# EAGLE board Kitty_PCB (EAGLE 9.2.2)
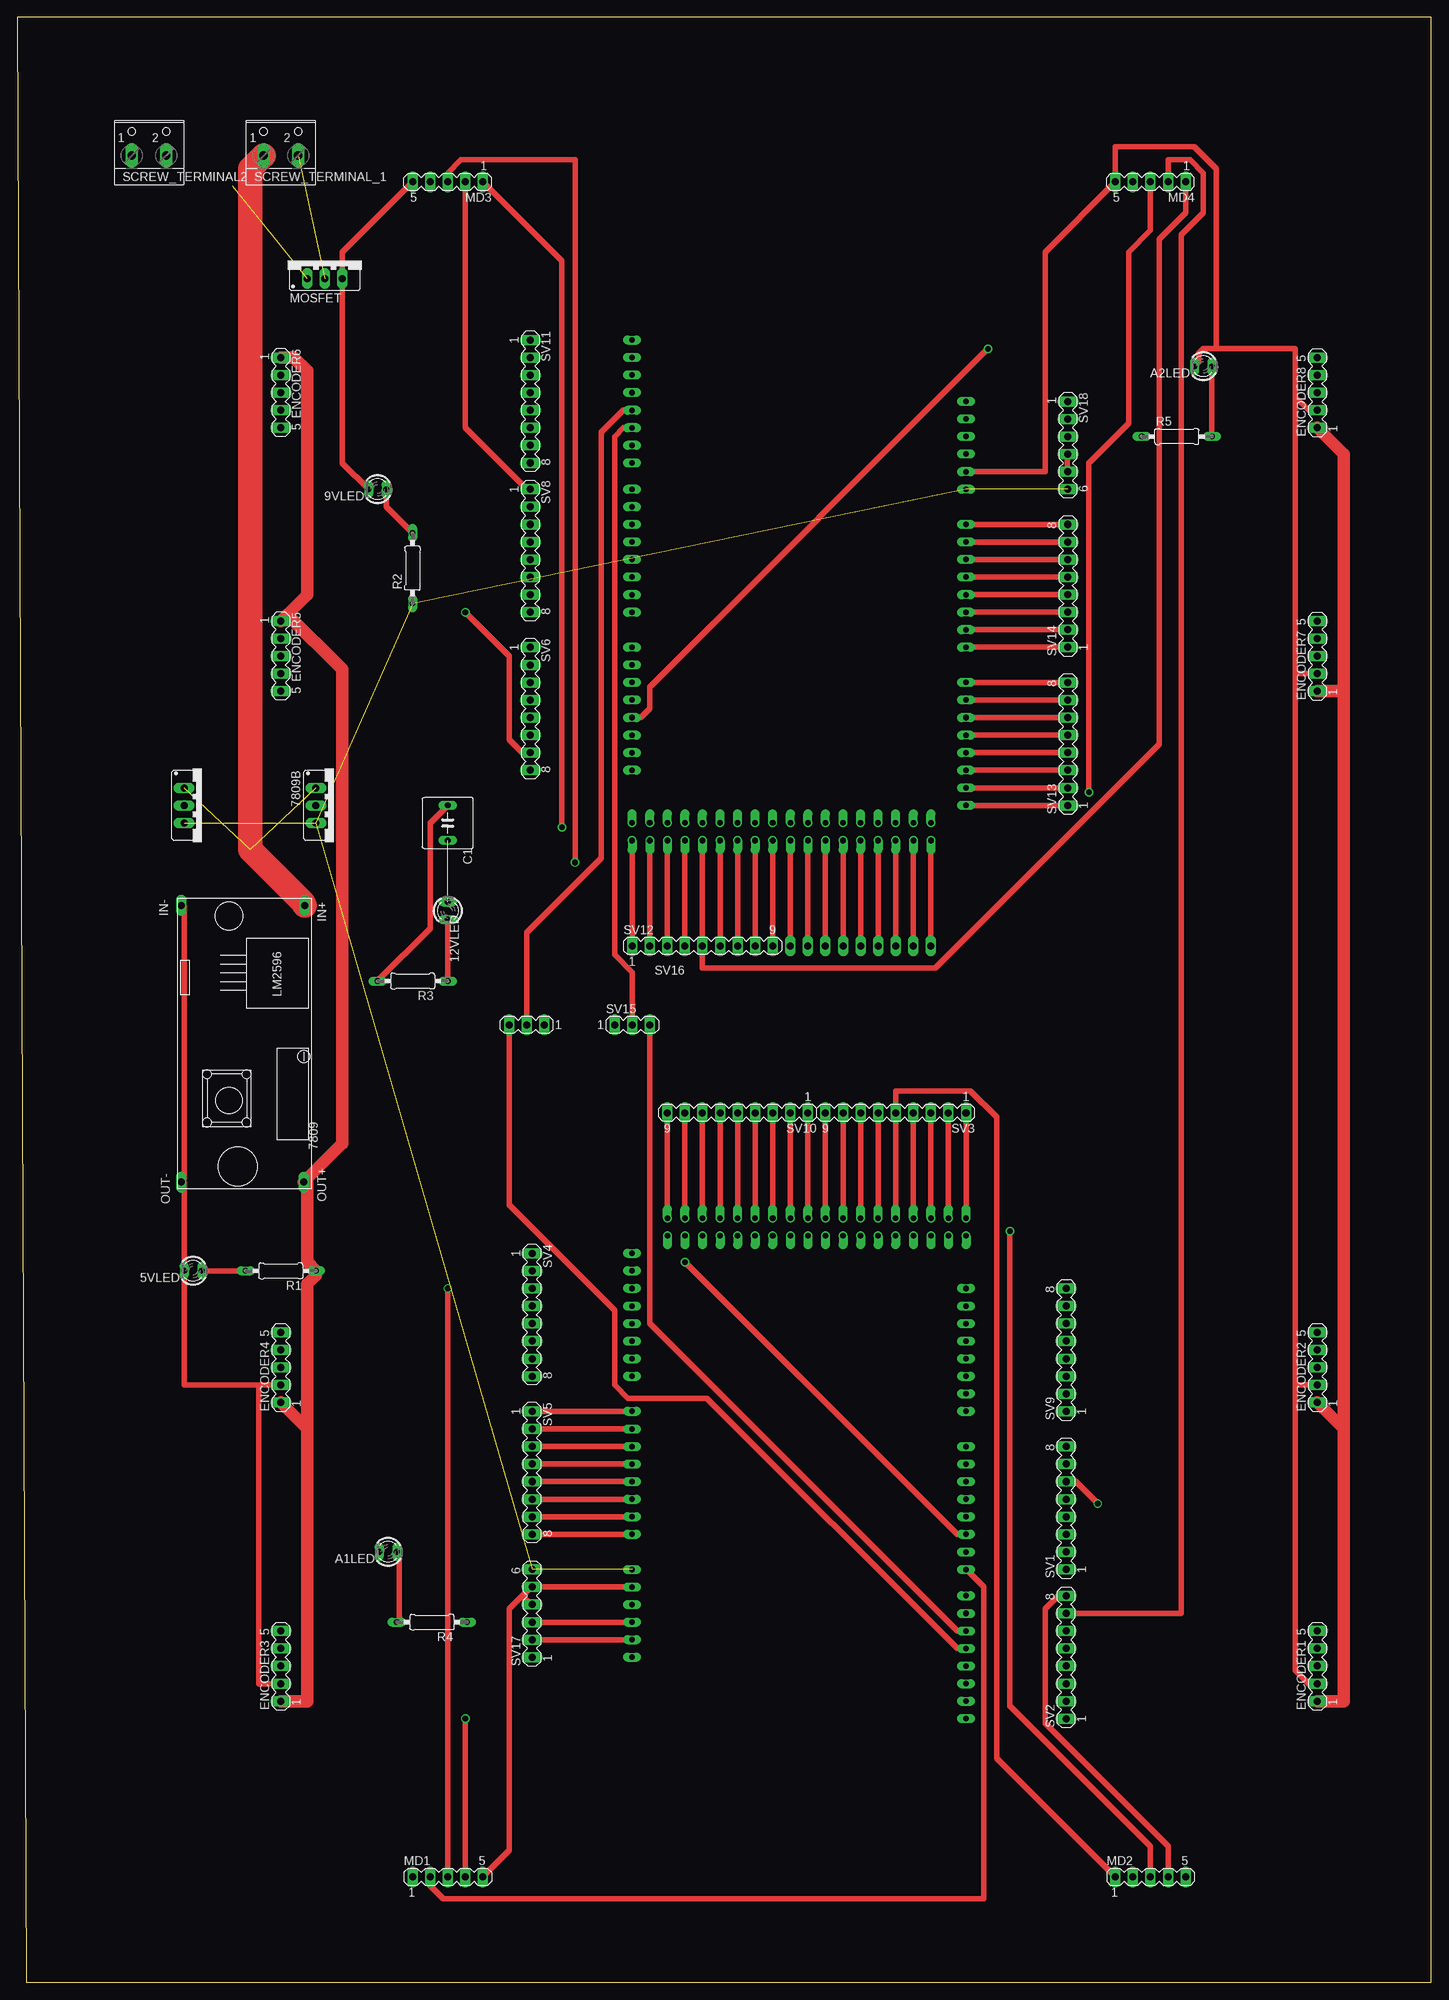
[diagram p0: board, top side]
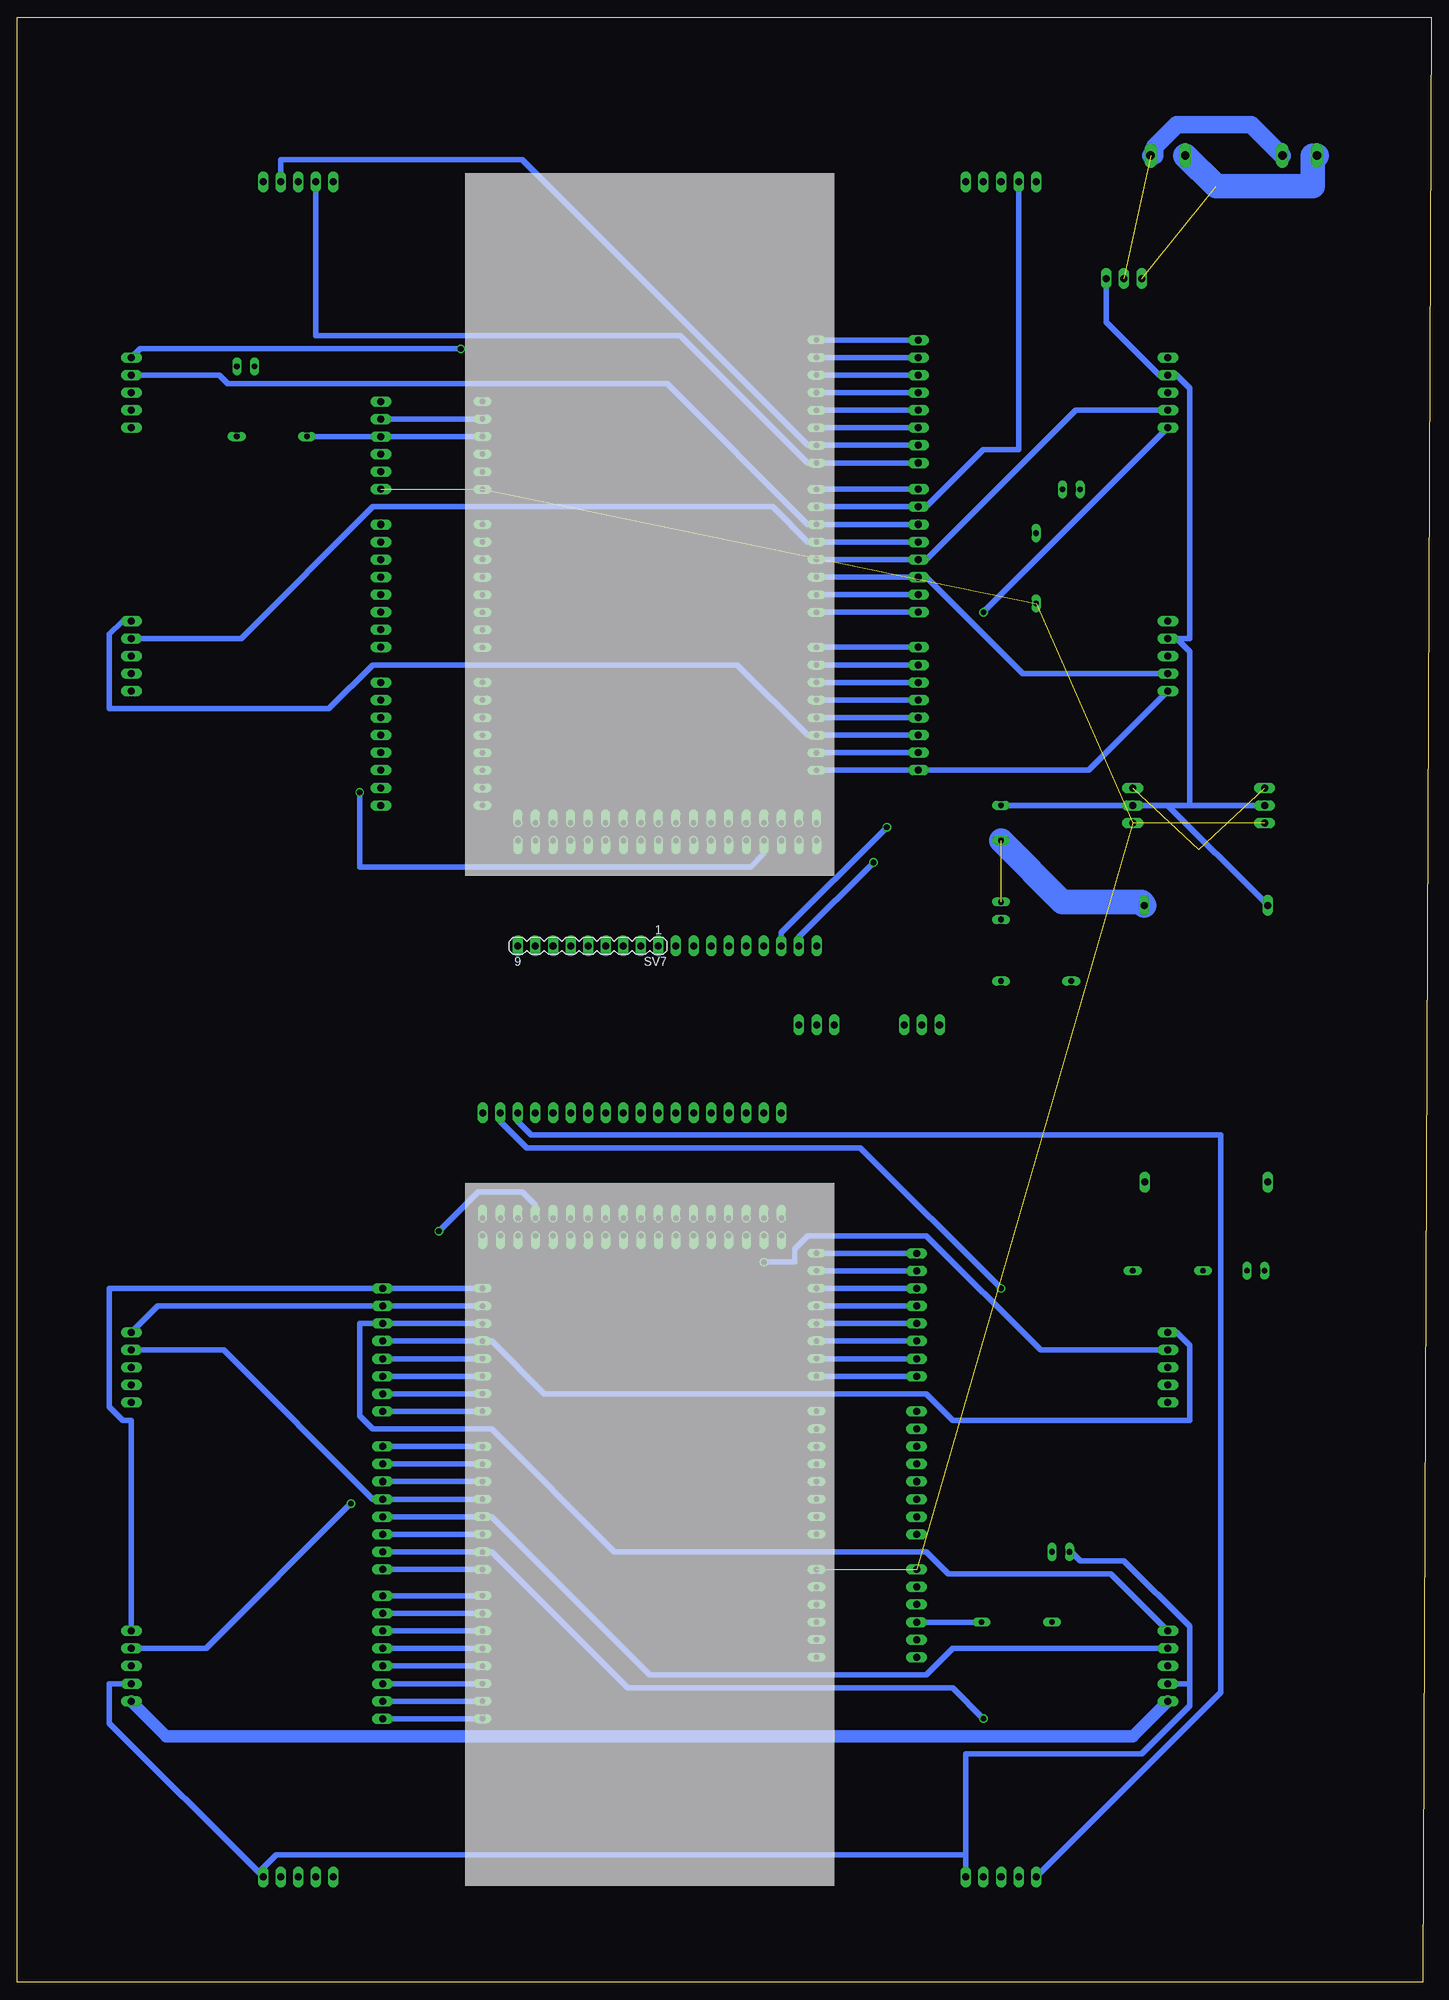
[diagram p1: board, bottom side, seen from below]

Size 204.45 x 284.15 mm. Coordinates in mm from the lower left corner, seen from the top.
Outline: 1.27,0 204.45,0 204.45,284.15 0,284.15 1.27,0
Copper layers (1*16): Top 0.035mm / dielectric 1.5mm / Bottom 0.035mm
Design rules "default *": minimum track width 10mil, minimum drill 24mil, track to track 8mil, track to pad 8mil, pad to pad 8mil, via to via 8mil, smd to smd 8mil, copper to edge 40mil, drill to drill 8mil, minimum pad ring 10mil, minimum via ring 8mil, stop-mask expansion 4mil, vias tented up to drill 0mil, thermal gap 10mil
Net classes: 0 default: width 0.813 mm, drill 0.813 mm, clearance 0.813 mm; 2 9V: width 2.54 mm, drill 2.54 mm, clearance 0.813 mm; 3 12V: width 3.556 mm, drill 3.556 mm, clearance 0.813 mm; 4 5V: width 1.778 mm, drill 1.778 mm, clearance 0.813 mm

## Footprints (pad centres in the part's own frame; a part is rotated, then mirrored left to right if it is on the bottom)
LED3MM = drill 0.813 long: A -1.27,0; K 1.27,0
78XXS = drill 1.016 long: GND 0,-2.54; IN -2.54,-2.54; OUT 2.54,-2.54
MEGABOX = drill 0.8 long: 0 12.7,24.13; 1 10.16,24.13; 2 7.62,24.13; 3 5.08,24.13; 3V3 -15.24,-24.13; 4 2.54,24.13; 5 0,24.13; 5V -12.7,-24.13; 6 -2.54,24.13; 7 -5.08,24.13; 8 -8.89,24.13; 9 -11.43,24.13; 10 -13.97,24.13; 11 -16.51,24.13; 12 -19.05,24.13; 13 -21.59,24.13; 14 17.78,24.13; 15 20.32,24.13; 16 22.86,24.13; 17 25.4,24.13; 18 27.94,24.13; 19 30.48,24.13; 20 33.02,24.13; 21 35.56,24.13; A0 0,-24.13; A1 2.54,-24.13; A2 5.08,-24.13; A3 7.62,-24.13; A4 10.16,-24.13; A5 12.7,-24.13; A6 15.24,-24.13; A7 17.78,-24.13; A8 22.86,-24.13; A9 25.4,-24.13; A10 27.94,-24.13; A11 30.48,-24.13; A12 33.02,-24.13; A13 35.56,-24.13; A14 38.1,-24.13; A15 40.64,-24.13; AREF -26.67,24.13; GND@1 -24.13,24.13; GND@2 -10.16,-24.13; GND@3 -7.62,-24.13; RESET -17.78,-24.13; VIN -5.08,-24.13 | drill 0.8 offset: 22 43.18,21.59; 23 45.72,21.59; 24 43.18,19.05; 25 45.72,19.05; 26 43.18,16.51; 27 45.72,16.51; 28 43.18,13.97; 29 45.72,13.97; 30 43.18,11.43; 31 45.72,11.43; 32 43.18,8.89; 33 45.72,8.89; 34 43.18,6.35; 35 45.72,6.35; 36 43.18,3.81; 37 45.72,3.81; 38 43.18,1.27; 39 45.72,1.27; 40 43.18,-1.27; 41 45.72,-1.27; 42 43.18,-3.81; 43 45.72,-3.81; 44 43.18,-6.35; 45 45.72,-6.35; 46 43.18,-8.89; 47 45.72,-8.89; 48 43.18,-11.43; 49 45.72,-11.43; 50 43.18,-13.97; 51 45.72,-13.97; 52 43.18,-16.51; 53 45.72,-16.51; GND@4 43.18,24.13; GND@5 45.72,24.13; GND@6 43.18,-19.05; GND@7 45.72,-19.05
C050-075X075 = drill 0.813 long: 1 -2.54,0; 2 2.54,0
MA05-1 = drill 1.016 long: 1 -5.08,0; 2 -2.54,0; 3 0,0; 4 2.54,0; 5 5.08,0
0207/10 = drill 0.813 long: 1 -5.08,0; 2 5.08,0
POWER_CONNECTOR = drill 1.194 long: 1 -2.5,-1.27; 2 2.5,-1.27
MA08-1 = drill 1.016 long: 1 -8.89,0; 2 -6.35,0; 3 -3.81,0; 4 -1.27,0; 5 1.27,0; 6 3.81,0; 7 6.35,0; 8 8.89,0
MA09-1 = drill 1.016 long: 1 -10.16,0; 2 -7.62,0; 3 -5.08,0; 4 -2.54,0; 5 0,0; 6 2.54,0; 7 5.08,0; 8 7.62,0; 9 10.16,0
MA03-1 = drill 1.016 long: 1 -2.54,0; 2 0,0; 3 2.54,0
MA06-1 = drill 1.016 long: 1 -6.35,0; 2 -3.81,0; 3 -1.27,0; 4 1.27,0; 5 3.81,0; 6 6.35,0
BUCK_CONVERTER = drill 1.016 long: IN+ -18.558,7.255; IN- -18.558,-10.618; OUT+ 21.442,7.128; OUT- 21.442,-10.618

## Placement (x,y rotation side)
5VLED  LED  [LED3MM]  25.4,102.87 180 top
9VLED  LED  [LED3MM]  52.07,215.9 180 top
12VLED  LED  [LED3MM]  62.23,154.94 270 top
7809  [78XXS]  26.67,170.18 270 top
7809B  [78XXS]  45.72,170.18 270 top
A1LED  LED  [LED3MM]  53.59,62.23 180 top
A2LED  LED  [LED3MM]  171.45,233.68 180 top
ARDUINO1  MEGA_DEVICE  [MEGABOX]  113.03,64.77 90 bottom
ARDUINO2  MEGA_DEVICE  [MEGABOX]  113.03,210.82 270 bottom
C1  [C050-075X075]  62.23,167.64 90 top
ENCODER1  [MA05-1]  187.96,45.72 90 top
ENCODER2  [MA05-1]  187.96,88.9 90 top
ENCODER3  [MA05-1]  38.1,45.72 90 top
ENCODER4  [MA05-1]  38.1,88.9 90 top
ENCODER5  [MA05-1]  38.1,191.77 270 top
ENCODER6  [MA05-1]  38.1,229.87 270 top
ENCODER7  [MA05-1]  187.96,191.77 90 top
ENCODER8  [MA05-1]  187.96,229.87 90 top
MD1  [MA05-1]  62.23,15.24 0 top
MD2  [MA05-1]  163.83,15.24 0 top
MD3  [MA05-1]  62.23,260.35 180 top
MD4  [MA05-1]  163.83,260.35 180 top
MOSFET  [78XXS]  44.45,248.92 0 top
R1  [0207/10]  38.1,102.87 180 top
R2  [0207/10]  57.15,204.47 90 top
R3  [0207/10]  57.15,144.78 180 top
R4  [0207/10]  59.94,52.07 180 top
R5  [0207/10]  167.64,223.52 0 top
SCREW_TERMINAL2  [POWER_CONNECTOR]  19.05,265.43 0 top
SCREW_TERMINAL_1  [POWER_CONNECTOR]  38.1,265.43 0 top
SV1  [MA08-1]  151.64,68.58 90 top
SV2  [MA08-1]  151.64,46.99 90 top
SV3  [MA09-1]  127,125.73 180 top
SV4  [MA08-1]  74.42,96.52 270 top
SV5  [MA08-1]  74.42,73.66 270 top
SV6  [MA08-1]  74.17,184.15 270 top
SV7  [MA09-1]  121.92,149.86 180 bottom
SV8  [MA08-1]  74.17,207.01 270 top
SV9  [MA08-1]  151.64,91.44 90 top
SV10  [MA09-1]  104.14,125.73 180 top
SV11  [MA08-1]  74.17,228.6 270 top
SV12  [MA09-1]  99.06,149.86 0 top
SV13  [MA08-1]  151.89,179.07 90 top
SV14  [MA08-1]  151.89,201.93 90 top
SV15  [MA03-1]  88.9,138.43 0 top
SV16  [MA03-1]  73.66,138.43 180 top
SV17  [MA06-1]  74.42,53.34 90 top
SV18  [MA06-1]  151.89,222.25 270 top
U$1  [BUCK_CONVERTER]  34.29,137.16 270 top

## Library data of the parts
5VLED 9VLED 12VLED A1LED A2LED = robocon; MF: VISHAY SEMICONDUCTOR; OC_FARNELL: 1612437
7809 7809B C1 MOSFET R1-R5 U$1 = robocon
ARDUINO1 ARDUINO2 = ArduinoMegaSymbol
ENCODER1-ENCODER8 MD1-MD4 SV1-SV18 = robocon; OC_FARNELL: unknown; OC_NEWARK: unknown
SCREW_TERMINAL2 SCREW_TERMINAL_1 = robocon; MPN: 237-102; OC_FARNELL: unknown; OC_NEWARK: 70K9898

## Nets
0A1: ARDUINO1.0 SV1.8
0A2: ARDUINO2.0 SV8.8
1A1: ARDUINO1.1 SV1.7
1A2: ARDUINO2.1 SV8.7
2A1: ARDUINO1.2 ENCODER1.4 SV1.6
2A2: ARDUINO2.2 ENCODER5.4 SV8.6
3A1: ARDUINO1.3 ENCODER2.4 SV1.5
3A2: ARDUINO2.3 ENCODER6.4 SV8.5
4A1: ARDUINO1.4 ENCODER3.4 SV1.4
4A2: ARDUINO2.4 ENCODER7.4 SV8.4
5A1: ARDUINO1.5 ENCODER4.4 SV1.3
5A2: ARDUINO2.5 ENCODER8.4 SV8.3
5V [5V]: ENCODER1.1 ENCODER2.1 ENCODER3.1 ENCODER4.1 ENCODER5.1 ENCODER6.1 ENCODER7.1 ENCODER8.1 R1.1 U$1.OUT+
6A1: ARDUINO1.6 MD1.4 SV1.2
6A2: ARDUINO2.6 MD3.4 SV8.2
7A1: ARDUINO1.7 MD1.2 SV1.1
7A2: ARDUINO2.7 MD3.2 SV8.1
8A1: ARDUINO1.8 MD2.4 SV2.8
8A2: ARDUINO2.8 MD4.4 SV11.8
9A1: MD2.2
9A2: ARDUINO1.9 ARDUINO2.9 MD4.2 SV2.7 SV11.7
9V [9V]: 7809.OUT 7809B.OUT ARDUINO1.VIN ARDUINO2.VIN R2.1 SV17.6 SV18.6
12A1: ARDUINO1.12 SV2.4
12A2: ARDUINO2.12 SV11.4
12V_IN_GND [9V]: MOSFET.GND SCREW_TERMINAL2.2 SCREW_TERMINAL_1.2
12V_OUT [12V]: 12VLED.A 7809.IN 7809B.IN C1.1 MOSFET.IN SCREW_TERMINAL2.1 SCREW_TERMINAL_1.1 U$1.IN+
13A1: ARDUINO1.13 SV2.3
13A2: ARDUINO2.13 SV11.3
14A1: ARDUINO1.14 SV9.1
14A2: ARDUINO2.14 SV6.1
15A1: ARDUINO1.15 SV9.2
15A2: ARDUINO2.15 SV6.2
16A1: ARDUINO1.16 SV9.3
16A2: ARDUINO2.16 SV6.3
17A1: ARDUINO1.17 SV9.4
17A2: ARDUINO2.17 SV6.4
18A1: ARDUINO1.18 ENCODER4.5 SV9.5
18A2: ARDUINO2.18 ENCODER8.5 SV6.5
19A1: ARDUINO1.19 ENCODER3.5 SV9.6
19A2: ARDUINO2.19 ENCODER7.5 SV6.6
20A1: ARDUINO1.20 ENCODER2.5 SV9.7
20A2: ARDUINO2.20 ENCODER6.5 SV6.7
21A1: ARDUINO1.21 ENCODER1.5 SV9.8
21A2: ARDUINO2.21 ENCODER5.5 SV6.8
23A1: ARDUINO1.23 MD1.3 SV3.2
23A2: ARDUINO2.23 MD3.3 SV12.2
25A1: ARDUINO1.25 MD1.1 SV3.3
25A2: ARDUINO2.25 MD3.1 SV12.3
27A1: ARDUINO1.27 MD2.3 SV3.4
27A2: ARDUINO2.27 MD4.3 SV12.4
29A1: ARDUINO1.29 MD2.1 SV3.5
29A2: ARDUINO2.29 MD4.1 SV12.5
31A1: ARDUINO1.31 SV3.6
31A2: ARDUINO2.31 SV12.6
33A1: ARDUINO1.33 SV3.7
33A2: ARDUINO2.33 SV12.7
35A1: ARDUINO1.35 SV3.8
35A2: ARDUINO2.35 SV12.8
37A1: ARDUINO1.37 SV3.9
37A2: ARDUINO2.37 SV12.9
A1SC1: ARDUINO1.10 SV2.6 SV15.3
A1SC2: ARDUINO1.11 SV2.5 SV16.3
A2SC1: ARDUINO2.10 SV11.6 SV15.2
A2SC2: ARDUINO2.11 SV11.5 SV16.2
GND: 5VLED.K 9VLED.K 7809.GND 7809B.GND A1LED.K A2LED.K ARDUINO1.GND@3 ARDUINO2.GND@3 C1.2 ENCODER1.2 ENCODER2.2 ENCODER3.2 ENCODER4.2 ENCODER5.2 ENCODER6.2 ENCODER7.2 ENCODER8.2 MD1.5 MD2.5 MD3.5 MD4.5 MOSFET.OUT R3.2 SV17.4 SV17.5 U$1.IN- U$1.OUT-
N$1: ARDUINO1.3V3 SV17.2
N$2: ARDUINO1.5V R4.1 SV17.3
N$3: 5VLED.A R1.2
N$4: SV18.4 SV18.5
N$5: ARDUINO2.3V3 SV18.2
N$6: ARDUINO2.5V R5.1 SV18.3
N$7: A1LED.A R4.2
N$8: A2LED.A R5.2
N$19: 9VLED.A R2.2
N$20: ARDUINO1.GND@5 SV3.1
N$24: ARDUINO1.GND@1 SV2.2
N$25: ARDUINO1.AREF SV2.1
N$26: ARDUINO1.A15 SV4.1
N$27: ARDUINO1.A14 SV4.2
N$28: ARDUINO1.A13 SV4.3
N$29: ARDUINO1.A12 SV4.4
N$30: ARDUINO1.A11 SV4.5
N$31: ARDUINO1.A10 SV4.6
N$32: ARDUINO1.A9 SV4.7
N$33: ARDUINO1.A8 SV4.8
N$34: ARDUINO1.A7 SV5.1
N$35: ARDUINO1.A6 SV5.2
N$36: ARDUINO1.A5 SV5.3
N$37: ARDUINO1.A4 SV5.4
N$38: ARDUINO1.A3 SV5.5
N$39: ARDUINO1.A2 SV5.6
N$40: ARDUINO1.A1 SV5.7
N$41: ARDUINO1.A0 SV5.8
N$59: SV15.1
N$64: ARDUINO2.GND@1 SV11.2
N$65: ARDUINO2.AREF SV11.1
N$66: ARDUINO2.A15 SV13.1
N$67: ARDUINO2.A14 SV13.2
N$68: ARDUINO2.A13 SV13.3
N$69: ARDUINO2.A12 SV13.4
N$70: ARDUINO2.A11 SV13.5
N$71: ARDUINO2.A10 SV13.6
N$72: ARDUINO2.A9 SV13.7
N$73: ARDUINO2.A8 SV13.8
N$74: ARDUINO2.A7 SV14.1
N$75: ARDUINO2.A6 SV14.2
N$76: ARDUINO2.A5 SV14.3
N$77: ARDUINO2.A4 SV14.4
N$78: ARDUINO2.A3 SV14.5
N$79: ARDUINO2.A2 SV14.6
N$80: ARDUINO2.A1 SV14.7
N$81: ARDUINO2.A0 SV14.8
N$82: SV16.1
N$88: ARDUINO1.39 SV10.1
N$89: ARDUINO1.41 SV10.2
N$90: ARDUINO1.43 SV10.3
N$91: ARDUINO1.45 SV10.4
N$92: ARDUINO1.47 SV10.5
N$93: ARDUINO1.49 SV10.6
N$94: ARDUINO1.51 SV10.7
N$95: ARDUINO1.53 SV10.8
N$96: ARDUINO1.GND@7 SV10.9
N$97: ARDUINO2.GND@5 SV12.1
N$106: ARDUINO2.39 SV7.1
N$107: ARDUINO2.41 SV7.2
N$108: ARDUINO2.43 SV7.3
N$109: ARDUINO2.45 SV7.4
N$110: ARDUINO2.47 SV7.5
N$111: ARDUINO2.49 SV7.6
N$112: ARDUINO2.51 SV7.7
N$113: ARDUINO2.53 SV7.8
N$114: ARDUINO2.GND@7 SV7.9
N$115: 12VLED.K R3.1
N$118: ENCODER1.3
N$122: ENCODER2.3
N$126: ENCODER4.3
N$130: ENCODER3.3

## Tracks (layer width: path | path; a pad name or v marks a point on that pad's centre or on a via)
0A1
  Bottom 0.813: SV1.8 ARDUINO1.0
0A2
  Bottom 0.813: SV8.8 ARDUINO2.0
1A1
  Bottom 0.813: SV1.7 ARDUINO1.1
1A2
  Bottom 0.813: SV8.7 ARDUINO2.1
2A1  (via drill 0.81)
  Top 0.813: v156.21,69.22 153.03,72.39 SV1.6
  Bottom 0.813: SV1.6 ARDUINO1.2 | ENCODER1.4 177.16,48.26 v156.21,69.22
2A2
  Bottom 0.813: ARDUINO2.2 SV8.6 73.03,203.2 59.05,189.23 ENCODER5.4
3A1
  Bottom 0.813: ARDUINO1.3 SV1.5 153.03,69.85 174.62,91.44 ENCODER2.4
3A2
  Bottom 0.813: ARDUINO2.3 SV8.5 73.03,205.74 51.44,227.33 ENCODER6.4
4A1
  Bottom 0.813: SV1.4 ARDUINO1.4 135.89,67.31 113.03,44.45 73.03,44.45 69.22,48.26 ENCODER3.4
4A2
  Bottom 0.813: SV8.4 ARDUINO2.4 90.17,208.28 95.25,213.36 153.03,213.36 172.09,194.31 ENCODER7.4
5A1  (via drill 0.81)
  Top 0.813: v96.52,104.14 135.89,64.77 ARDUINO1.5
  Bottom 0.813: SV1.3 ARDUINO1.5 | ENCODER4.4 56.52,91.44 73.03,107.95 90.17,107.95 92.08,106.05 92.08,104.14 v96.52,104.14
5A2
  Bottom 0.813: SV8.3 ARDUINO2.5 90.17,210.82 110.49,231.14 173.99,231.14 175.26,232.41 ENCODER8.4
5V
  Top 1.778: 191.77,186.69 ENCODER7.1 | 191.77,186.69 191.77,220.98 ENCODER8.1 | ENCODER1.1 191.77,40.64 191.77,80.01 | ENCODER2.1 191.77,80.01 | 191.77,80.01 191.77,186.69 | 39.05,197.8 41.91,200.66 41.91,233.05 40.01,234.95 ENCODER6.1 | 39.05,197.8 ENCODER5.1 | ENCODER3.1 41.91,40.64 41.91,80.01 | ENCODER4.1 41.91,80.01 | 41.91,80.01 41.91,100.97 43.18,102.24 R1.1 41.91,104.14 41.91,115.57 U$1.OUT+ 41.91,116.21 46.99,121.28 46.99,189.87 39.05,197.8
  Bottom 1.778: ENCODER1.1 182.88,35.56 43.18,35.56 ENCODER3.1
6A1  (via drill 0.81)
  Top 0.813: v64.77,38.1 MD1.4
  Bottom 0.813: SV1.2 ARDUINO1.6 135.89,62.23 116.2,42.55 69.22,42.55 v64.77,38.1
6A2
  Bottom 0.813: ARDUINO2.6 SV8.2 73.03,213.36 64.77,221.62 59.69,221.62 MD3.4
7A1
  Top 0.813: MD1.2 59.69,13.97 61.59,12.06 139.7,12.06 139.7,57.15 ARDUINO1.7
  Bottom 0.813: SV1.1 ARDUINO1.7
7A2
  Top 0.813: MD3.2 64.77,224.79 73.66,215.9 SV8.1
  Bottom 0.813: SV8.1 ARDUINO2.7
8A1
  Top 0.813: MD2.4 166.37,19.69 148.59,37.47 148.59,53.97 150.5,55.88 SV2.8
  Bottom 0.813: SV2.8 ARDUINO1.8
8A2
  Bottom 0.813: SV11.8 ARDUINO2.8 90.17,219.71 108.58,238.12 161.29,238.12 MD4.4
9A2
  Top 0.813: SV2.7 168.28,53.34 168.28,252.73 171.45,255.91 171.45,261.62 169.54,263.53 166.37,263.53 MD4.2
  Bottom 0.813: SV2.7 ARDUINO1.9 | SV11.7 ARDUINO2.9 90.17,222.25 131.44,263.53 166.37,263.53 MD4.2
9V  (6 unrouted)
12A1
  Bottom 0.813: SV2.4 ARDUINO1.12
12A2
  Bottom 0.813: SV11.4 ARDUINO2.12
12V_IN_GND  (1 unrouted)
  Bottom 2.54: SCREW_TERMINAL2.2 21.59,264.16 26.04,268.61 36.83,268.61 40.01,265.43 40.01,264.16 SCREW_TERMINAL_1.2
12V_OUT  (4 unrouted)
  Top 3.556: SCREW_TERMINAL_1.1 35.56,264.16 33.66,262.25 33.66,163.83 41.27,156.21 U$1.IN+
  Bottom 3.556: SCREW_TERMINAL2.1 17.14,264.16 17.14,259.72 31.11,259.72 35.56,264.16 SCREW_TERMINAL_1.1 | C1.1 53.34,156.21 41.91,156.21 U$1.IN+
13A1
  Bottom 0.813: SV2.3 ARDUINO1.13
13A2
  Bottom 0.813: SV11.3 ARDUINO2.13
14A1
  Bottom 0.813: SV9.1 ARDUINO1.14
14A2
  Bottom 0.813: SV6.1 ARDUINO2.14
15A1
  Bottom 0.813: SV9.2 ARDUINO1.15
15A2
  Bottom 0.813: SV6.2 ARDUINO2.15
16A1
  Bottom 0.813: SV9.3 ARDUINO1.16
16A2
  Bottom 0.813: SV6.3 ARDUINO2.16
17A1
  Bottom 0.813: SV9.4 ARDUINO1.17
17A2
  Bottom 0.813: SV6.4 ARDUINO2.17
18A1
  Bottom 0.813: SV9.5 ARDUINO1.18 135.89,92.71 128.27,85.09 73.03,85.09 69.22,81.28 34.92,81.28 34.92,92.08 36.83,93.98 ENCODER4.5
18A2  (via drill 0.81)
  Top 0.813: v140.34,236.22 91.44,187.32 91.44,184.15 90.17,182.88 ARDUINO2.18
  Bottom 0.813: SV6.5 ARDUINO2.18 | ENCODER8.5 186.69,236.22 v140.34,236.22
19A1
  Bottom 0.813: ARDUINO1.19 SV9.6 154.94,95.25 154.94,81.92 153.03,80.01 135.89,80.01 118.11,62.23 73.03,62.23 69.85,59.06 46.35,59.06 ENCODER3.5
19A2
  Bottom 0.813: SV6.6 ARDUINO2.19 90.17,180.34 100.33,190.5 153.03,190.5 159.38,184.15 191.13,184.15 191.13,194.94 189.23,196.85 ENCODER7.5
20A1
  Bottom 0.813: ARDUINO1.20 SV9.7 184.15,97.79 ENCODER2.5
20A2  (via drill 0.81)
  Top 0.813: v64.77,198.12 71.12,191.77 71.12,179.71 73.03,177.8 SV6.7
  Bottom 0.813: SV6.7 ARDUINO2.20 | v64.77,198.12 ENCODER6.5
21A1
  Bottom 0.813: ARDUINO1.21 SV9.8 191.13,100.33 191.13,83.19 189.23,81.28 187.96,81.28 ENCODER1.5
21A2
  Bottom 0.813: ARDUINO2.21 SV6.8 49.53,175.26 ENCODER5.5
23A1  (via drill 0.81)
  Top 0.813: SV3.2 ARDUINO1.23 | v62.23,100.33 MD1.3
  Bottom 0.813: v62.23,100.33 82.55,120.65 130.81,120.65 134.62,124.46 SV3.2
23A2  (via drill 0.81)
  Top 0.813: SV12.2 ARDUINO2.23 | MD3.3 62.23,261.62 64.14,263.53 80.64,263.53 v80.64,161.93
  Bottom 0.813: v80.64,161.93 91.44,151.13 SV12.2
25A1
  Top 0.813: SV3.3 ARDUINO1.25
  Bottom 0.813: MD1.1 30.48,41.91 30.48,122.56 130.18,122.56 132.08,124.46 SV3.3
25A2  (via drill 0.81)
  Top 0.813: SV12.3 ARDUINO2.25 | MD3.1 78.74,248.92 v78.74,167
  Bottom 0.813: v78.74,167 93.98,151.76 SV12.3
27A1  (via drill 0.81)
  Top 0.813: SV3.4 ARDUINO1.27 | MD2.3 163.83,19.69 143.51,40 v143.51,108.59
  Bottom 0.813: v143.51,108.59 137.79,114.3 131.44,114.3 129.54,112.4 ARDUINO1.27
27A2  (via drill 0.81)
  Top 0.813: SV12.4 ARDUINO2.27 | MD4.3 163.83,253.37 160.66,250.19 160.66,225.43 154.94,219.71 v154.94,172.09
  Bottom 0.813: v154.94,172.09 154.94,161.29 98.42,161.29 96.52,163.19 ARDUINO2.27
29A1
  Top 0.813: ARDUINO1.29 SV3.5 127,128.91 137.79,128.91 141.6,125.09 141.6,32.39 MD2.1
29A2
  Top 0.813: ARDUINO2.29 SV12.5 99.06,146.69 132.72,146.69 165.1,179.07 165.1,252.09 168.91,255.91 MD4.1
31A1
  Top 0.813: SV3.6 ARDUINO1.31
31A2
  Top 0.813: SV12.6 ARDUINO2.31
33A1
  Top 0.813: SV3.7 ARDUINO1.33
33A2
  Top 0.813: SV12.7 ARDUINO2.33
35A1
  Top 0.813: SV3.8 ARDUINO1.35
35A2
  Top 0.813: SV12.8 ARDUINO2.35
37A1
  Top 0.813: SV3.9 ARDUINO1.37
37A2
  Top 0.813: SV12.9 ARDUINO2.37
A1SC1
  Top 0.813: SV15.3 91.44,95.25 135.89,50.8 ARDUINO1.10
  Bottom 0.813: SV2.6 ARDUINO1.10
A1SC2
  Top 0.813: SV16.3 71.12,112.4 86.36,97.16 86.36,86.36 88.27,84.46 99.69,84.46 135.89,48.26 ARDUINO1.11
  Bottom 0.813: SV2.5 ARDUINO1.11
A2SC1
  Top 0.813: SV15.2 88.9,146.05 86.36,148.59 86.36,223.52 87.63,224.79 ARDUINO2.10
  Bottom 0.813: SV11.6 ARDUINO2.10
A2SC2
  Top 0.813: SV16.2 73.66,151.76 84.45,162.56 84.45,224.16 87.63,227.33 ARDUINO2.11
  Bottom 0.813: SV11.5 ARDUINO2.11
GND
  Top 0.813: 184.78,86.36 ENCODER2.2 | 184.78,86.36 184.78,45.09 186.69,43.18 ENCODER1.2 | A2LED.K 170.81,234.31 170.81,235.59 171.45,236.22 173.35,236.22 | 173.35,236.22 184.78,236.22 184.78,229.24 | 184.78,229.24 186.69,227.33 ENCODER8.2 | 184.78,189.23 ENCODER7.2 | 184.78,229.24 184.78,189.23 | ARDUINO2.GND@3 148.59,218.44 148.59,250.19 MD4.5 158.75,265.43 170.18,265.43 173.35,262.25 173.35,236.22 | 184.78,189.23 184.78,86.36 | 9VLED.K 46.99,219.71 MOSFET.OUT 46.99,250.19 MD3.5 | R3.2 59.69,152.4 59.69,167.64 C1.2 | ARDUINO1.GND@3 SV17.5 74.3,57.15 73.03,55.88 | MD1.5 71.12,19.05 71.12,53.97 73.03,55.88 | 73.03,55.88 74.3,54.61 SV17.4 | 34.92,86.36 24.13,86.36 5VLED.K 24.13,115.57 U$1.OUT- 24.13,116.21 24.13,155.57 U$1.IN- | 34.92,86.36 ENCODER4.2 | ENCODER3.2 34.92,43.18 34.92,86.36
  Bottom 0.813: 169.54,15.88 191.13,37.47 191.13,43.18 ENCODER1.2 | MOSFET.OUT 46.99,240.03 39.37,232.41 ENCODER6.2 36.83,232.41 34.92,230.5 34.92,194.31 36.83,194.31 | 38.1,170.18 24.13,156.21 U$1.IN- | 38.1,170.18 7809B.GND C1.2 | 38.1,170.18 34.92,170.18 | 34.92,170.18 7809.GND | 36.83,194.31 34.92,192.41 34.92,170.18 | 36.83,194.31 ENCODER5.2 | 34.92,43.18 34.92,51.44 44.45,60.96 50.8,60.96 52.07,62.23 A1LED.K | ENCODER3.2 34.92,43.18 | 67.31,18.42 67.31,33.02 41.91,33.02 34.92,40 34.92,43.18 | 67.31,18.42 MD1.5 | 169.54,15.88 167,18.42 67.31,18.42 | 169.54,15.88 MD2.5
N$1
  Top 0.813: SV17.2 ARDUINO1.3V3
N$2
  Top 0.813: SV17.3 ARDUINO1.5V
  Bottom 0.813: SV17.3 R4.1
N$3
  Top 0.813: R1.2 5VLED.A
N$4
  Top 0.813: SV18.5 151.76,218.44 151.76,220.98 SV18.4
N$5
  Bottom 0.813: SV18.2 ARDUINO2.3V3
N$6
  Bottom 0.813: ARDUINO2.5V SV18.3 R5.1
N$7
  Top 0.813: R4.2 55.24,52.07 55.24,62.23 A1LED.A
N$8
  Top 0.813: A2LED.A R5.2
N$19
  Top 0.813: R2.2 53.34,213.36 9VLED.A
N$20
  Top 0.813: SV3.1 ARDUINO1.GND@5
N$24
  Bottom 0.813: SV2.2 ARDUINO1.GND@1
N$25
  Bottom 0.813: SV2.1 ARDUINO1.AREF
N$26
  Bottom 0.813: SV4.1 ARDUINO1.A15
N$27
  Bottom 0.813: SV4.2 ARDUINO1.A14
N$28
  Bottom 0.813: SV4.3 ARDUINO1.A13
N$29
  Bottom 0.813: SV4.4 ARDUINO1.A12
N$30
  Bottom 0.813: SV4.5 ARDUINO1.A11
N$31
  Bottom 0.813: SV4.6 ARDUINO1.A10
N$32
  Bottom 0.813: SV4.7 ARDUINO1.A9
N$33
  Bottom 0.813: SV4.8 ARDUINO1.A8
N$34
  Top 0.813: SV5.1 ARDUINO1.A7
N$35
  Top 0.813: SV5.2 ARDUINO1.A6
N$36
  Top 0.813: SV5.3 ARDUINO1.A5
N$37
  Top 0.813: SV5.4 ARDUINO1.A4
N$38
  Top 0.813: SV5.5 ARDUINO1.A3
N$39
  Top 0.813: SV5.6 ARDUINO1.A2
N$40
  Top 0.813: SV5.7 ARDUINO1.A1
N$41
  Top 0.813: SV5.8 ARDUINO1.A0
N$64
  Bottom 0.813: SV11.2 ARDUINO2.GND@1
N$65
  Bottom 0.813: SV11.1 ARDUINO2.AREF
N$66
  Top 0.813: SV13.1 ARDUINO2.A15
N$67
  Top 0.813: SV13.2 ARDUINO2.A14
N$68
  Top 0.813: SV13.3 ARDUINO2.A13
N$69
  Top 0.813: SV13.4 ARDUINO2.A12
N$70
  Top 0.813: SV13.5 ARDUINO2.A11
N$71
  Top 0.813: SV13.6 ARDUINO2.A10
N$72
  Top 0.813: SV13.7 ARDUINO2.A9
N$73
  Top 0.813: SV13.8 ARDUINO2.A8
N$74
  Top 0.813: SV14.1 ARDUINO2.A7
N$75
  Top 0.813: SV14.2 ARDUINO2.A6
N$76
  Top 0.813: SV14.3 ARDUINO2.A5
N$77
  Top 0.813: SV14.4 ARDUINO2.A4
N$78
  Top 0.813: SV14.5 ARDUINO2.A3
N$79
  Top 0.813: SV14.6 ARDUINO2.A2
N$80
  Top 0.813: SV14.7 ARDUINO2.A1
N$81
  Top 0.813: SV14.8 ARDUINO2.A0
N$88
  Top 0.813: SV10.1 ARDUINO1.39
N$89
  Top 0.813: SV10.2 ARDUINO1.41
N$90
  Top 0.813: SV10.3 ARDUINO1.43
N$91
  Top 0.813: SV10.4 ARDUINO1.45
N$92
  Top 0.813: SV10.5 ARDUINO1.47
N$93
  Top 0.813: SV10.6 ARDUINO1.49
N$94
  Top 0.813: SV10.7 ARDUINO1.51
N$95
  Top 0.813: SV10.8 ARDUINO1.53
N$96
  Top 0.813: SV10.9 ARDUINO1.GND@7
N$97
  Top 0.813: SV12.1 ARDUINO2.GND@5
N$106
  Top 0.813: SV7.1 ARDUINO2.39
N$107
  Top 0.813: SV7.2 ARDUINO2.41
N$108
  Top 0.813: SV7.3 ARDUINO2.43
N$109
  Top 0.813: SV7.4 ARDUINO2.45
N$110
  Top 0.813: SV7.5 ARDUINO2.47
N$111
  Top 0.813: SV7.6 ARDUINO2.49
N$112
  Top 0.813: SV7.7 ARDUINO2.51
N$113
  Top 0.813: SV7.8 ARDUINO2.53
N$114
  Top 0.813: SV7.9 ARDUINO2.GND@7
N$115
  Top 0.813: 12VLED.K R3.1

## Text on the board
Top: KITTY V1 | MaRS IITR